# EAGLE board CircuitClockSchematic (EAGLE 9.4.2)
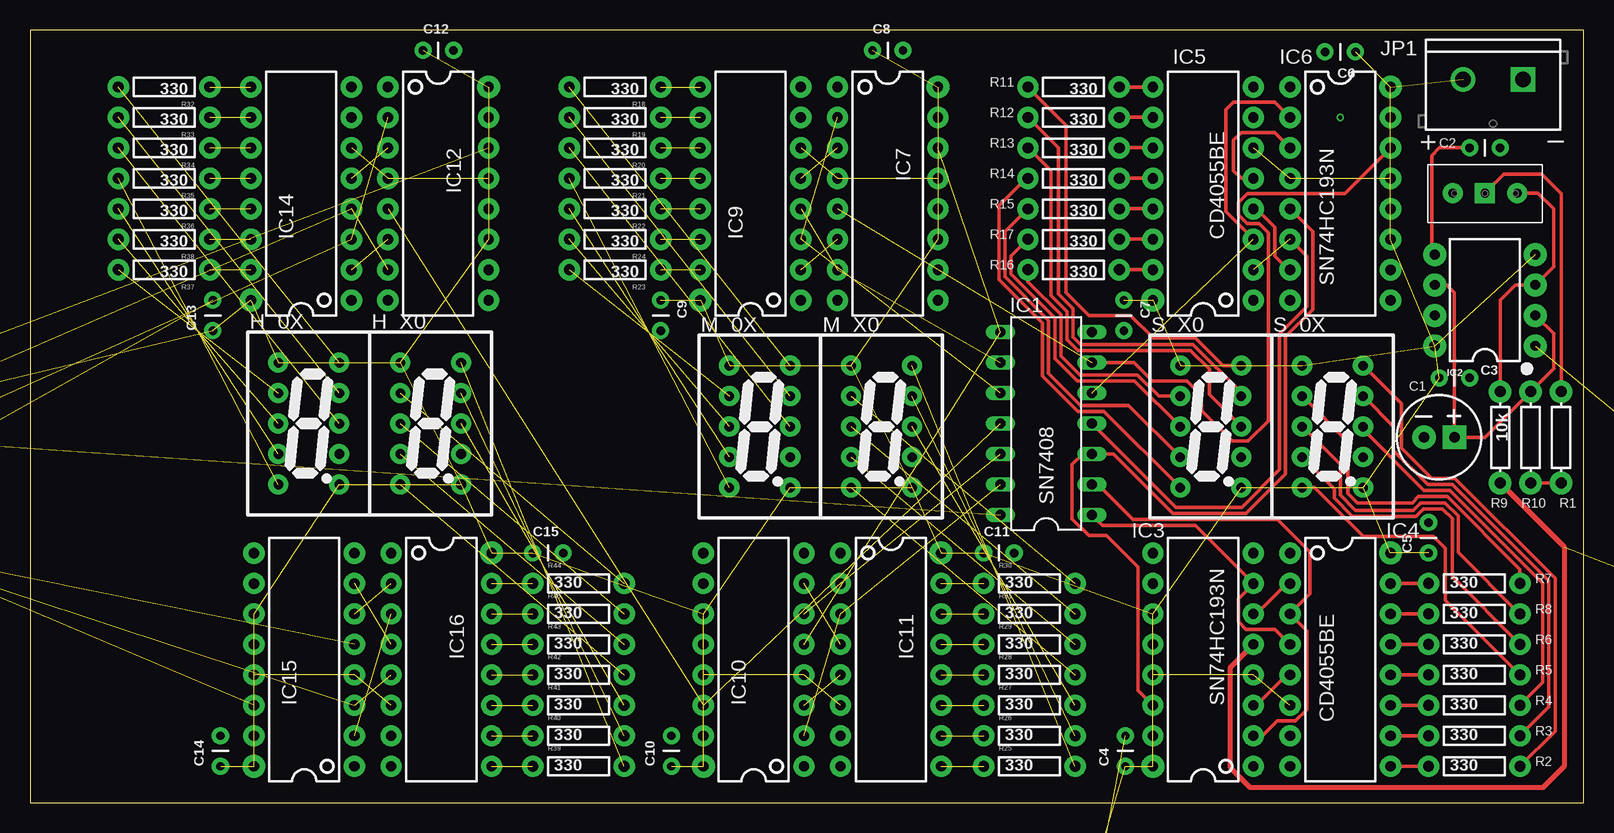
[diagram p0: board, top side]
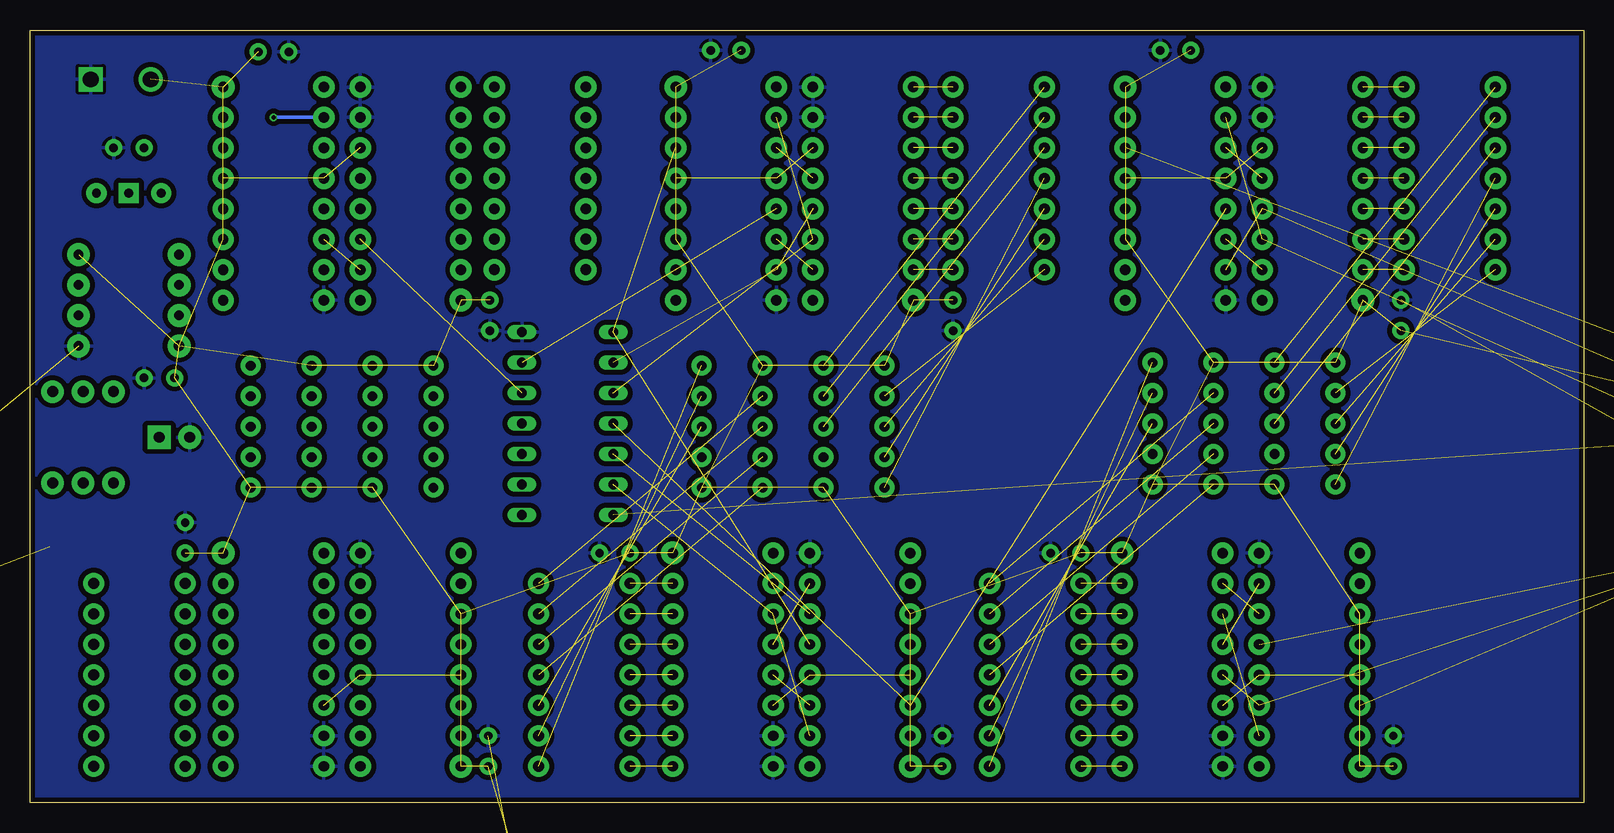
[diagram p1: board, bottom side, seen from below]

Size 129.52 x 64.44 mm. Coordinates in mm from the lower left corner, seen from the top.
Outline: 0,0 129.52,0 129.52,64.44 0,64.44 0,0
Copper layers (1*16): Top 0.035559375mm / dielectric 1.6mm / Bottom 0.035559375mm
Design rules "OshPark-2layer *": minimum track width 6mil, minimum drill 10mil, track to track 8mil, track to pad 8mil, pad to pad 8mil, via to via 8mil, smd to smd 6mil, copper to edge 15mil, drill to drill 6mil, minimum pad ring 5mil, minimum via ring 5mil, stop-mask expansion 2.5mil, vias tented up to drill 0mil, thermal gap 10mil

## Footprints (pad centres in the part's own frame; a part is rotated, then mirrored left to right if it is on the bottom)
2.54MM_LEAD-6.3MM_DIA = drill 0.9 pad 1.93 square: + 1.27,0 | drill 0.9 pad 1.93: - -1.27,0
CAP-PTH-SMALL = drill 0.7 pad 1.422: 1 0,0; 2 2.54,0
2.54MM_LEAD = drill 0.7 pad 1.422: 1 -1.27,0; 2 1.27,0
DO35-10 = drill 0.813 long: A 5.08,0; C -5.08,0
HDSP-7XXX = drill 0.8 pad 1.676: P$1 -2.54,5.08; P$2 -2.54,2.54; P$3 -2.54,0; P$4 -2.54,-2.54; P$5 -2.54,-5.08; P$6 2.54,-5.08; P$7 2.54,-2.54; P$8 2.54,0; P$9 2.54,2.54; P$10 2.54,5.08
DIL14 = drill 0.813 long: 1 -7.62,-3.81; 2 -5.08,-3.81; 3 -2.54,-3.81; 4 0,-3.81; 5 2.54,-3.81; 6 5.08,-3.81; 7 7.62,-3.81; 8 7.62,3.81; 9 5.08,3.81; 10 2.54,3.81; 11 0,3.81; 12 -2.54,3.81; 13 -5.08,3.81; 14 -7.62,3.81
DIP08-KIT = drill 0.813 pad 1.905: 1 -3.81,-4.191; 2 -1.27,-4.191; 3 1.27,-4.191; 4 3.81,-4.191; 5 3.81,4.191; 6 1.27,4.191; 7 -1.27,4.191 | drill 0.864 pad 1.905: 8 -3.81,4.191
DIL16 = drill 0.864 pad 1.778: 1 -8.89,-4.191; 2 -6.35,-4.191; 3 -3.81,-4.191; 4 -1.27,-4.191; 5 1.27,-4.191; 6 3.81,-4.191; 7 6.35,-4.191; 8 8.89,-4.191; 9 8.89,4.191; 10 6.35,4.191; 11 3.81,4.191; 12 1.27,4.191; 13 -1.27,4.191; 14 -3.81,4.191; 15 -6.35,4.191 | drill 0.864 pad 1.905: 16 -8.89,4.191
SCREWTERMINAL-5MM-2 = drill 1.3 pad 2.032 square: 1 0,0 | drill 1.3 pad 2.032: 2 5,0
AXIAL-0.3 = drill 0.9 pad 1.88: P$1 -3.81,0; P$2 3.81,0
1/4W_0.3 = drill 0.9 pad 1.778: P$1 -3.81,0; P$2 3.81,0
TACTILE-PTH = drill 1.016 pad 1.88: 1 -3.251,2.261; 2 3.251,2.261; 3 -3.251,-2.261; 4 3.251,-2.261
3296 = drill 0.737 pad 1.676: 1 -2.692,-0.035; 3 2.692,-0.035 | drill 0.737 pad 1.676 square: 2 0,-0.035

## Placement (x,y rotation side)
C1  47uF  [2.54MM_LEAD-6.3MM_DIA]  117.47,30.48 0 top
C2  [CAP-PTH-SMALL]  120.02,54.61 0 top
C3  0.1uF  [2.54MM_LEAD]  118.75,35.43 0 top
C4  0.1uF  [2.54MM_LEAD]  91.31,4.32 90 top
C5  0.1uF  [2.54MM_LEAD]  116.59,22.1 90 top
C6  0.1uF  [2.54MM_LEAD]  109.22,62.61 180 top
C7  0.1uF  [2.54MM_LEAD]  91.19,40.64 270 top
C8  0.1uF  [2.54MM_LEAD]  71.5,62.74 0 top
C9  0.1uF  [2.54MM_LEAD]  52.58,40.64 270 top
C10  0.1uF  [2.54MM_LEAD]  53.47,4.32 90 top
C11  0.1uF  [2.54MM_LEAD]  80.77,20.83 0 top
C12  0.1uF  [2.54MM_LEAD]  34.04,62.74 0 top
C13  0.1uF  [2.54MM_LEAD]  15.24,40.64 90 top
C14  0.1uF  [2.54MM_LEAD]  15.88,4.32 90 top
C15  0.1uF  [2.54MM_LEAD]  43.18,20.83 0 top
C16  0.1uF  [2.54MM_LEAD]  83.82,-26.67 0 top  (outside the outline)
C17  0.1uF  [2.54MM_LEAD]  -38.1,27.94 90 top  (outside the outline)
D1  [DO35-10]  -57.15,16.51 0 top  (outside the outline)
D2  [DO35-10]  -57.15,11.43 0 top  (outside the outline)
H_0X  HDSP-7XXX  [HDSP-7XXX]  23.24,31.62 0 top
H_X0  HDSP-7XXX  [HDSP-7XXX]  33.4,31.62 0 top
IC1  SN7408  [DIL14]  84.71,31.62 90 top
IC2  555  [DIP08-KIT]  121.28,41.91 90 top
IC3  SN74HC193N  [DIL16]  97.79,11.94 90 top
IC4  CD4055BE  [DIL16]  109.22,11.94 270 top
IC5  CD4055BE  [DIL16]  97.79,50.8 90 top
IC6  SN74HC193N  [DIL16]  109.22,50.8 270 top
IC7  SN74HC193N  [DIL16]  71.5,50.8 270 top
IC8  SN7408  [DIL14]  -24.13,27.94 0 top  (outside the outline)
IC9  CD4055BE  [DIL16]  60.07,50.8 90 top
IC10  SN74HC193N  [DIL16]  60.33,11.94 90 top
IC11  CD4055BE  [DIL16]  71.75,11.94 270 top
IC12  SN74HC193N  [DIL16]  34.04,50.8 270 top
IC14  CD4055BE  [DIL16]  22.61,50.8 90 top
IC15  SN74HC193N  [DIL16]  22.86,11.94 90 top
IC16  CD4055BE  [DIL16]  34.29,11.94 270 top
JP1  M025MM  [SCREWTERMINAL-5MM-2]  124.46,60.33 180 top
M_0X  HDSP-7XXX  [HDSP-7XXX]  60.83,31.37 0 top
M_X0  HDSP-7XXX  [HDSP-7XXX]  70.99,31.37 0 top
R1  [AXIAL-0.3]  125.09,30.48 270 top
R2  330  [1/4W_0.3]  120.4,3.05 0 top
R3  330  [1/4W_0.3]  120.4,5.59 0 top
R4  330  [1/4W_0.3]  120.4,8.13 0 top
R5  330  [1/4W_0.3]  120.4,10.67 0 top
R6  330  [1/4W_0.3]  120.4,13.21 0 top
R7  330  [1/4W_0.3]  120.4,18.29 0 top
R8  330  [1/4W_0.3]  120.4,15.75 0 top
R9  10k  [AXIAL-0.3]  122.56,30.48 270 top
R10  [AXIAL-0.3]  127.64,30.48 90 top
R11  330  [1/4W_0.3]  87,59.69 180 top
R12  330  [1/4W_0.3]  87,57.15 180 top
R13  330  [1/4W_0.3]  87,54.61 180 top
R14  330  [1/4W_0.3]  87,52.07 180 top
R15  330  [1/4W_0.3]  87,49.53 180 top
R16  330  [1/4W_0.3]  87,44.45 180 top
R17  330  [1/4W_0.3]  87,46.99 180 top
R18  330  [1/4W_0.3]  48.77,59.69 180 top
R19  330  [1/4W_0.3]  48.77,57.15 180 top
R20  330  [1/4W_0.3]  48.77,54.61 180 top
R21  330  [1/4W_0.3]  48.77,52.07 180 top
R22  330  [1/4W_0.3]  48.77,49.53 180 top
R23  330  [1/4W_0.3]  48.77,44.45 180 top
R24  330  [1/4W_0.3]  48.77,46.99 180 top
R25  330  [1/4W_0.3]  83.31,3.05 0 top
R26  330  [1/4W_0.3]  83.31,5.59 0 top
R27  330  [1/4W_0.3]  83.31,8.13 0 top
R28  330  [1/4W_0.3]  83.31,10.67 0 top
R29  330  [1/4W_0.3]  83.31,13.21 0 top
R30  330  [1/4W_0.3]  83.31,18.29 0 top
R31  330  [1/4W_0.3]  83.31,15.75 0 top
R32  330  [1/4W_0.3]  11.18,59.69 180 top
R33  330  [1/4W_0.3]  11.18,57.15 180 top
R34  330  [1/4W_0.3]  11.18,54.61 180 top
R35  330  [1/4W_0.3]  11.18,52.07 180 top
R36  330  [1/4W_0.3]  11.18,49.53 180 top
R37  330  [1/4W_0.3]  11.18,44.45 180 top
R38  330  [1/4W_0.3]  11.18,46.99 180 top
R39  330  [1/4W_0.3]  45.72,3.05 0 top
R40  330  [1/4W_0.3]  45.72,5.59 0 top
R41  330  [1/4W_0.3]  45.72,8.13 0 top
R42  330  [1/4W_0.3]  45.72,10.67 0 top
R43  330  [1/4W_0.3]  45.72,13.21 0 top
R44  330  [1/4W_0.3]  45.72,18.29 0 top
R45  330  [1/4W_0.3]  45.72,15.75 0 top
R46  10k  [AXIAL-0.3]  -58.42,7.62 0 top  (outside the outline)
S1  [TACTILE-PTH]  147.96,14.61 180 top  (outside the outline)
S_0X  HDSP-7XXX  [HDSP-7XXX]  108.58,31.37 0 top
S_X0  HDSP-7XXX  [HDSP-7XXX]  98.42,31.37 0 top
VR1  BOURNS_3296  [3296]  121.28,50.8 180 top

## Library data of the parts
C1 C3-C17 = Capacitors
C2 = SparkFun-Capacitors
D1 D2 = Diodes
H_0X H_X0 M_0X M_X0 S_0X S_X0 = led-7-segment
IC1 IC8 = 74xx-us
IC2 = SparkFun-IC-Special-Function; PROD_ID: IC-09173; PROD_ID_ALT: IC-11930
IC3-IC7 IC9-IC12 IC14-IC16 = ICs
JP1 = SparkFun-Connectors; STOREFRONT_ID: PRT-08432
R1 R9 R10 R46 = SparkFun-Passives
R2-R8 R11-R45 = Resistors
S1 = SparkFun-Electromechanical
VR1 = Offboard Potentiometer

## Nets
CLK: IC3.5 R9.P$2 S1.1
GND: C1.- C2.2 C3.2 C4.2 C5.2 C6.2 C7.2 C8.2 C9.2 C10.2 C11.2 C12.2 C13.2 C14.2 C15.2 C16.2 C17.2 IC1.7 IC2.1 IC3.8 IC4.7 IC4.8 IC5.7 IC5.8 IC6.8 IC7.8 IC8.7 IC9.7 IC9.8 IC10.8 IC11.7 IC11.8 IC12.8 IC14.7 IC14.8 IC15.8 IC16.7 IC16.8 JP1.1 R46.P$2 S1.3
HR_MAJOR_C: D1.C D2.C IC12.14 R46.P$1
HR_MINOR_C: D2.A IC8.3 IC15.5
MIN_MAJOR_C: IC1.11 IC10.14 IC12.5
MIN_MINOR_C: IC1.8 IC7.14 IC10.5
N$1: IC1.4 IC5.2 IC6.6
N$2: C1.+ IC2.2 IC2.6 R1.P$1
N$3: IC3.3 IC4.5
N$4: C2.1 IC2.5
N$5: IC1.2 IC3.2 IC4.3
N$6: IC1.5 IC5.3 IC6.2
N$7: IC7.3 IC9.5
N$8: IC4.9 R2.P$1
N$9: IC4.10 R3.P$1
N$10: IC4.11 R4.P$1
N$11: IC4.12 R5.P$1
N$12: IC4.13 R6.P$1
N$13: IC4.15 R7.P$1
N$14: IC4.14 R8.P$1
N$15: IC2.3 R9.P$1 VR1.1
N$16: R2.P$2 S_0X.P$10
N$17: R3.P$2 S_0X.P$9
N$18: R4.P$2 S_0X.P$8
N$19: R5.P$2 S_0X.P$5
N$20: R6.P$2 S_0X.P$4
N$21: R7.P$2 S_0X.P$2
N$22: R8.P$2 S_0X.P$3
N$23: R1.P$2 R10.P$1
N$24: R10.P$2 VR1.2
N$25: IC1.1 IC3.7 IC4.4
N$26: IC9.9 R18.P$1
N$27: IC5.4 IC6.7
N$28: IC5.5 IC6.3
N$29: IC3.6 IC4.2
N$30: IC5.9 R11.P$1
N$31: IC5.10 R12.P$1
N$32: IC5.11 R13.P$1
N$33: IC5.12 R14.P$1
N$34: IC5.13 R15.P$1
N$35: IC5.15 R16.P$1
N$36: IC5.14 R17.P$1
N$37: R11.P$2 S_X0.P$10
N$38: R12.P$2 S_X0.P$9
N$39: R13.P$2 S_X0.P$8
N$40: R14.P$2 S_X0.P$5
N$41: R15.P$2 S_X0.P$4
N$42: R16.P$2 S_X0.P$2
N$43: R17.P$2 S_X0.P$3
N$44: IC9.10 R19.P$1
N$45: IC9.11 R20.P$1
N$46: IC9.12 R21.P$1
N$47: IC9.13 R22.P$1
N$48: IC9.15 R23.P$1
N$49: IC9.14 R24.P$1
N$50: M_0X.P$10 R18.P$2
N$51: M_0X.P$9 R19.P$2
N$52: M_0X.P$8 R20.P$2
N$53: M_0X.P$5 R21.P$2
N$54: M_0X.P$4 R22.P$2
N$55: M_0X.P$2 R23.P$2
N$56: M_0X.P$3 R24.P$2
N$57: IC10.3 IC11.5
N$58: IC11.9 R25.P$1
N$59: IC11.10 R26.P$1
N$60: IC11.11 R27.P$1
N$61: IC11.12 R28.P$1
N$62: IC11.13 R29.P$1
N$63: IC11.15 R30.P$1
N$64: IC11.14 R31.P$1
N$65: M_X0.P$10 R25.P$2
N$66: M_X0.P$9 R26.P$2
N$67: M_X0.P$8 R27.P$2
N$68: M_X0.P$5 R28.P$2
N$69: M_X0.P$4 R29.P$2
N$70: M_X0.P$2 R30.P$2
N$71: M_X0.P$3 R31.P$2
N$72: IC10.7 IC11.4
N$73: IC7.6 IC9.2
N$74: IC1.12 IC10.6 IC11.2
N$75: IC1.13 IC10.2 IC11.3
N$76: IC1.9 IC7.7 IC9.4
N$77: IC1.10 IC7.2 IC9.3
N$80: IC12.3 IC14.5
N$81: IC14.9 R32.P$1
N$82: IC14.10 R33.P$1
N$83: IC14.11 R34.P$1
N$84: IC14.12 R35.P$1
N$85: IC14.13 R36.P$1
N$86: IC14.15 R37.P$1
N$87: IC14.14 R38.P$1
N$88: H_0X.P$10 R32.P$2
N$89: H_0X.P$9 R33.P$2
N$90: H_0X.P$8 R34.P$2
N$91: H_0X.P$5 R35.P$2
N$92: H_0X.P$4 R36.P$2
N$93: H_0X.P$2 R37.P$2
N$94: H_0X.P$3 R38.P$2
N$96: IC16.9 R39.P$1
N$97: IC16.10 R40.P$1
N$98: IC16.11 R41.P$1
N$99: IC16.12 R42.P$1
N$100: IC16.13 R43.P$1
N$101: IC16.15 R44.P$1
N$102: IC16.14 R45.P$1
N$103: H_X0.P$10 R39.P$2
N$104: H_X0.P$9 R40.P$2
N$105: H_X0.P$8 R41.P$2
N$106: H_X0.P$5 R42.P$2
N$107: H_X0.P$4 R43.P$2
N$108: H_X0.P$2 R44.P$2
N$109: H_X0.P$3 R45.P$2
N$110: IC15.7 IC16.4
N$111: IC12.6 IC14.2
N$112: IC15.6 IC16.2
N$113: IC15.2 IC16.3
N$114: IC8.1 IC12.7 IC14.4
N$115: IC8.2 IC8.4 IC12.2 IC14.3
N$117: D1.A IC8.6 IC15.14
N$118: IC8.5 IC15.3 IC16.5
SEC_MAJOR_C: IC1.6 IC6.14 IC7.5
SEC_MINOR_C: IC1.3 IC3.14 IC6.5
VCC: IC1.14 IC8.14
VCC_MAIN: C3.1 C4.1 C5.1 C6.1 C7.1 C8.1 C9.1 C10.1 C11.1 C12.1 C13.1 C14.1 C15.1 C16.1 C17.1 H_0X.P$1 H_0X.P$6 H_X0.P$1 H_X0.P$6 IC2.4 IC2.8 IC3.4 IC3.11 IC3.12 IC3.13 IC3.16 IC4.6 IC4.16 IC5.6 IC5.16 IC6.4 IC6.11 IC6.12 IC6.13 IC6.16 IC7.4 IC7.11 IC7.12 IC7.13 IC7.16 IC9.6 IC9.16 IC10.4 IC10.11 IC10.12 IC10.13 IC10.16 IC11.6 IC11.16 IC12.4 IC12.11 IC12.12 IC12.13 IC12.16 IC14.6 IC14.16 IC15.4 IC15.11 IC15.12 IC15.13 IC15.16 IC16.6 IC16.16 JP1.2 M_0X.P$1 M_0X.P$6 M_X0.P$1 M_X0.P$6 S_0X.P$1 S_0X.P$6 S_X0.P$1 S_X0.P$6

## Tracks (layer width: path | path; a pad name or v marks a point on that pad's centre or on a via)
CLK  (1 unrouted)
  Top 0.406: R9.P$2 127.89,21.34 127.89,3.05 126.11,1.27 101.73,1.27 100.08,2.92 100.08,11.3 IC3.5
GND  (5 unrouted)
  pour Bottom (isolate 0.406): 0,0 0,64.14 129.54,64.14 129.54,0
HR_MAJOR_C  (3 unrouted)
HR_MINOR_C  (2 unrouted)
MIN_MAJOR_C  (2 unrouted)
MIN_MINOR_C  (2 unrouted)
N$1  (1 unrouted)
  Top 0.305: IC1.4 95.5,24.64 101,24.64 104.14,27.78 104.14,39.07 106.43,41.36 106.43,45.59 IC6.6
N$2
  Top 0.305: IC2.6 118.11,43.18 118.75,42.55 C1.+ 121.28,30.48 R1.P$1 127,36.2 127,39.12 IC2.2
N$3
  Top 0.305: IC3.3 102.23,8.13 104.78,10.67 IC4.5
N$4
  Top 0.305: IC2.5 116.84,45.97 116.84,53.98 117.47,54.61 C2.1
N$5
  Top 0.305: IC3.2 102.74,5.59 103.99,6.83 105.49,6.83 106.43,7.76 106.43,14.35 IC4.3 106.68,17.4 106.68,20.94 104,23.62 91.95,23.62 88.9,26.67 88.65,26.67 IC1.2
N$6  (via drill 0.35)  (1 unrouted)
  Top 0.305: IC5.3 99.69,49.28 99.69,57.78 100.33,58.42 103.76,58.42 IC6.2
  Bottom 0.305: v109.22,57.15 IC6.2
N$7  (1 unrouted)
N$8
  Top 0.305: IC4.9 R2.P$1
N$9
  Top 0.305: IC4.10 R3.P$1
N$10
  Top 0.305: IC4.11 R4.P$1
N$11
  Top 0.305: IC4.12 R5.P$1
N$12
  Top 0.305: IC4.13 R6.P$1
N$13
  Top 0.305: IC4.15 R7.P$1
N$14
  Top 0.305: IC4.14 R8.P$1
N$15
  Top 0.305: VR1.1 125.69,50.84 127,49.53 127,44.7 IC2.3 123.83,43.18 122.56,41.91 R9.P$1
N$16
  Top 0.305: S_0X.P$10 114.3,33.27 114.3,29.59 116.84,27.05 118.78,27.05 127.13,18.71 127.13,5.97 R2.P$2
N$17
  Top 0.305: S_0X.P$9 113.67,31.37 113.67,29.38 116.5,26.54 118.57,26.54 126.62,18.5 126.62,8 R3.P$2
N$18
  Top 0.305: R4.P$2 126.11,10.03 126.11,18.29 118.36,26.04 116.2,26.04 111.12,31.11 S_0X.P$8
N$19
  Top 0.305: R5.P$2 117.98,16.89 117.98,21.21 116.97,22.23 111.12,22.23 107.06,26.29 S_0X.P$5
N$20
  Top 0.305: S_0X.P$4 108.71,26.16 108.71,25.4 110.24,23.88 115.53,23.88 116.17,24.51 117.73,24.51 118.54,23.7 118.54,18.87 R6.P$2
N$21
  Top 0.305: S_0X.P$2 109.86,30.1 109.86,25.78 110.64,24.99 115.21,24.99 115.74,25.53 118.15,25.53 124.21,19.47 R7.P$2
N$22
  Top 0.305: S_0X.P$3 109.22,28.19 109.22,25.65 110.49,24.38 115.32,24.38 115.95,25.02 117.94,25.02 119.05,23.91 119.05,20.86 124.16,15.75 R8.P$2
N$23
  Top 0.305: R1.P$2 R10.P$1
N$24
  Top 0.305: VR1.2 122.86,52.41 126.03,52.41 127.64,50.8 R10.P$2
N$25
  Top 0.305: IC4.4 103.76,14.48 101.35,14.48 100.71,15.11 100.71,17.02 IC3.7 97.16,23.11 89.41,23.11 IC1.1
N$26  (1 unrouted)
N$27
  Top 0.305: IC6.7 104.9,44.45 103.76,45.59 103.76,48.01 102.23,49.53 IC5.4
N$28
  Top 0.305: IC5.5 100.97,52.07 100.33,52.7 100.33,55.24 100.97,55.88 103.76,55.88 IC6.3
N$29
  Top 0.305: IC3.6 102.23,15.75 104.78,18.29 IC4.2
N$30
  Top 0.305: R11.P$1 IC5.9
N$31
  Top 0.305: R12.P$1 IC5.10
N$32
  Top 0.305: R13.P$1 IC5.11
N$33
  Top 0.305: R14.P$1 IC5.12
N$34
  Top 0.305: R15.P$1 IC5.13
N$35
  Top 0.305: R16.P$1 IC5.15
N$36
  Top 0.305: R17.P$1 IC5.14
N$37
  Top 0.305: R11.P$2 86.36,56.52 86.36,42.56 88.28,40.64 91.75,40.64 93.65,38.73 97.16,38.73 99.44,36.45 S_X0.P$10
N$38
  Top 0.305: R12.P$2 85.72,54.61 85.72,42.43 86.94,41.21 86.94,38.84 87.56,38.23 96.94,38.23 100.97,34.21 S_X0.P$9
N$39
  Top 0.305: R13.P$2 85.09,52.7 85.09,42.31 86.44,40.96 86.44,38.63 87.35,37.72 96.73,37.72 98.3,36.16 98.3,34.04 S_X0.P$8
N$40
  Top 0.305: R14.P$2 83.06,52.07 80.77,49.78 80.77,43.65 84.4,40.02 84.4,35.59 87.35,32.64 89.53,32.64 S_X0.P$5
N$41
  Top 0.305: R15.P$2 81.28,47.62 81.28,43.86 84.91,40.23 84.91,35.8 87.56,33.15 91.57,33.15 S_X0.P$4
N$42
  Top 0.305: S_X0.P$2 94.11,33.91 92.33,35.69 87.5,35.69 85.93,37.26 85.93,40.69 83.19,43.43 R16.P$2
N$43
  Top 0.305: R17.P$2 81.79,45.59 81.79,44.07 85.42,40.44 85.42,37.05 87.29,35.18 92.08,35.18 S_X0.P$3
N$44  (1 unrouted)
N$45  (1 unrouted)
N$46  (1 unrouted)
N$47  (1 unrouted)
N$48  (1 unrouted)
N$49  (1 unrouted)
N$50  (1 unrouted)
N$51  (1 unrouted)
N$52  (1 unrouted)
N$53  (1 unrouted)
N$54  (1 unrouted)
N$55  (1 unrouted)
N$56  (1 unrouted)
N$57  (1 unrouted)
N$58  (1 unrouted)
N$59  (1 unrouted)
N$60  (1 unrouted)
N$61  (1 unrouted)
N$62  (1 unrouted)
N$63  (1 unrouted)
N$64  (1 unrouted)
N$65  (1 unrouted)
N$66  (1 unrouted)
N$67  (1 unrouted)
N$68  (1 unrouted)
N$69  (1 unrouted)
N$70  (1 unrouted)
N$71  (1 unrouted)
N$72  (1 unrouted)
N$73  (1 unrouted)
N$74  (2 unrouted)
N$75  (2 unrouted)
N$76  (2 unrouted)
N$77  (2 unrouted)
N$80  (1 unrouted)
N$81  (1 unrouted)
N$82  (1 unrouted)
N$83  (1 unrouted)
N$84  (1 unrouted)
N$85  (1 unrouted)
N$86  (1 unrouted)
N$87  (1 unrouted)
N$88  (1 unrouted)
N$89  (1 unrouted)
N$90  (1 unrouted)
N$91  (1 unrouted)
N$92  (1 unrouted)
N$93  (1 unrouted)
N$94  (1 unrouted)
N$96  (1 unrouted)
N$97  (1 unrouted)
N$98  (1 unrouted)
N$99  (1 unrouted)
N$100  (1 unrouted)
N$101  (1 unrouted)
N$102  (1 unrouted)
N$103  (1 unrouted)
N$104  (1 unrouted)
N$105  (1 unrouted)
N$106  (1 unrouted)
N$107  (1 unrouted)
N$108  (1 unrouted)
N$109  (1 unrouted)
N$110  (1 unrouted)
N$111  (1 unrouted)
N$112  (1 unrouted)
N$113  (1 unrouted)
N$114  (2 unrouted)
N$115  (3 unrouted)
N$117  (2 unrouted)
N$118  (2 unrouted)
SEC_MAJOR_C  (1 unrouted)
  Top 0.305: IC1.6 92.03,36.7 93.56,35.18 96.43,35.18 97.66,33.95 97.66,32.73 100.24,30.15 101.52,30.15 103.23,31.85 103.23,47.52 102.46,48.28 101.47,48.28 100.71,49.04 100.71,50.04 101.47,50.8 109.62,50.8 113.41,54.59 IC6.14
SEC_MINOR_C
  Top 0.305: IC3.14 92.35,9.37 92.35,19.66 89.74,22.28 88.27,22.28 86.87,23.68 86.87,28.19 87.76,29.08 IC1.3 90.3,29.08 95.25,24.13 101.35,24.13 104.65,27.43 104.65,38.86 106.93,41.15 106.93,47.62 IC6.5
VCC  (1 unrouted)
VCC_MAIN  (71 unrouted)

## Text on the board
tPlace: Derek Nash / Isaac Rex | + | –